# Altium PCB HE280PCB.PcbDoc
Units mil, origin at the board's own origin, x right, y up, seen from the top; angles counter-clockwise.
Board outline 1899.12 x 1801.97 mil, 2 copper layers (Top Layer, Top, Bottom Layer, Bottom), stack 60.8 mil thick; 61 components, 24 nets, 133 pads, 28 vias.
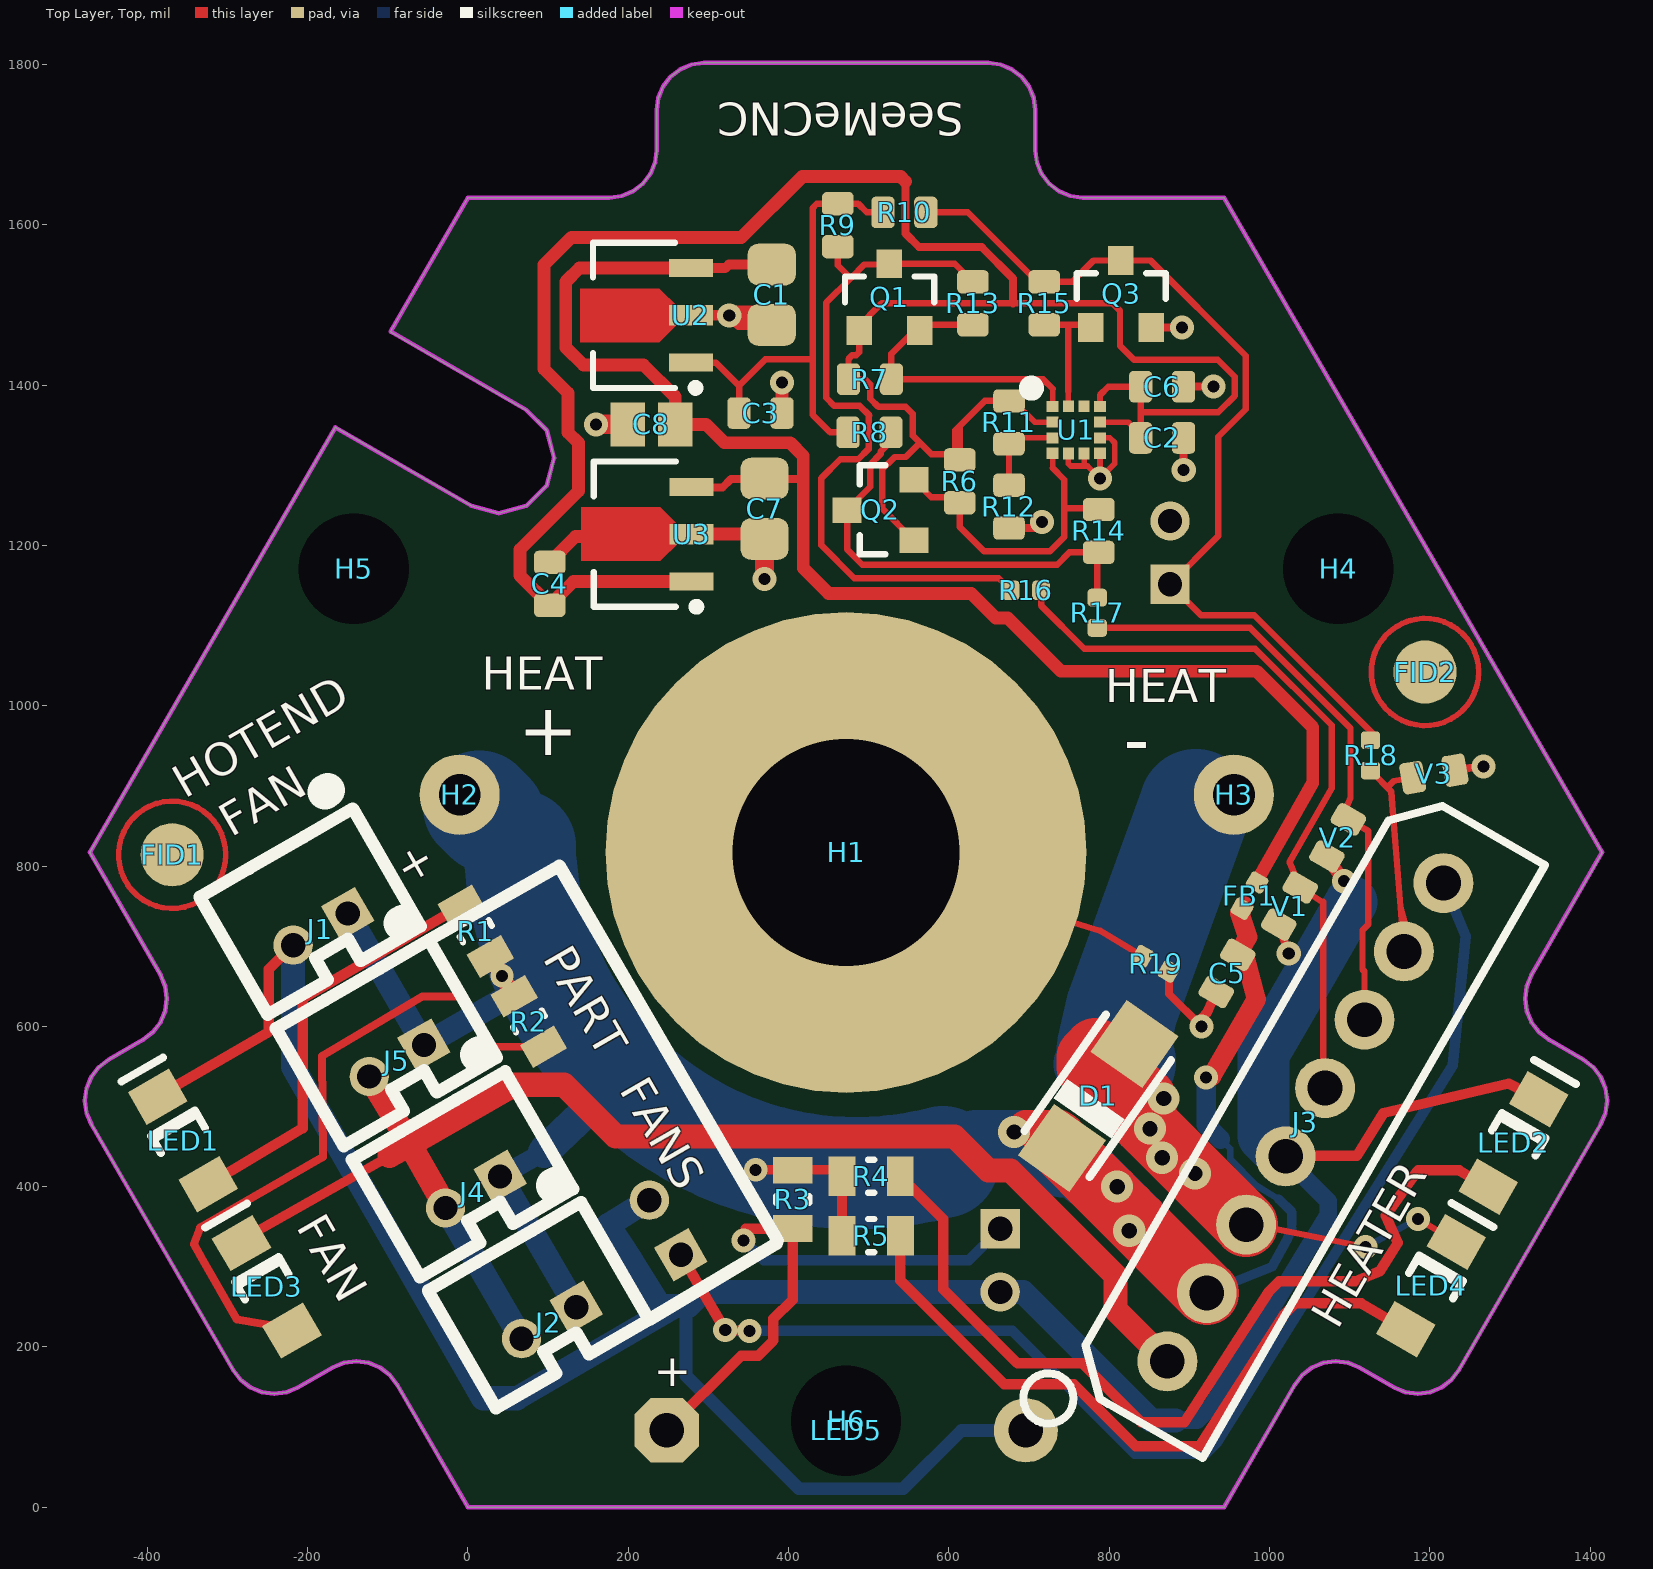
[diagram p0: Top Layer, Top view]
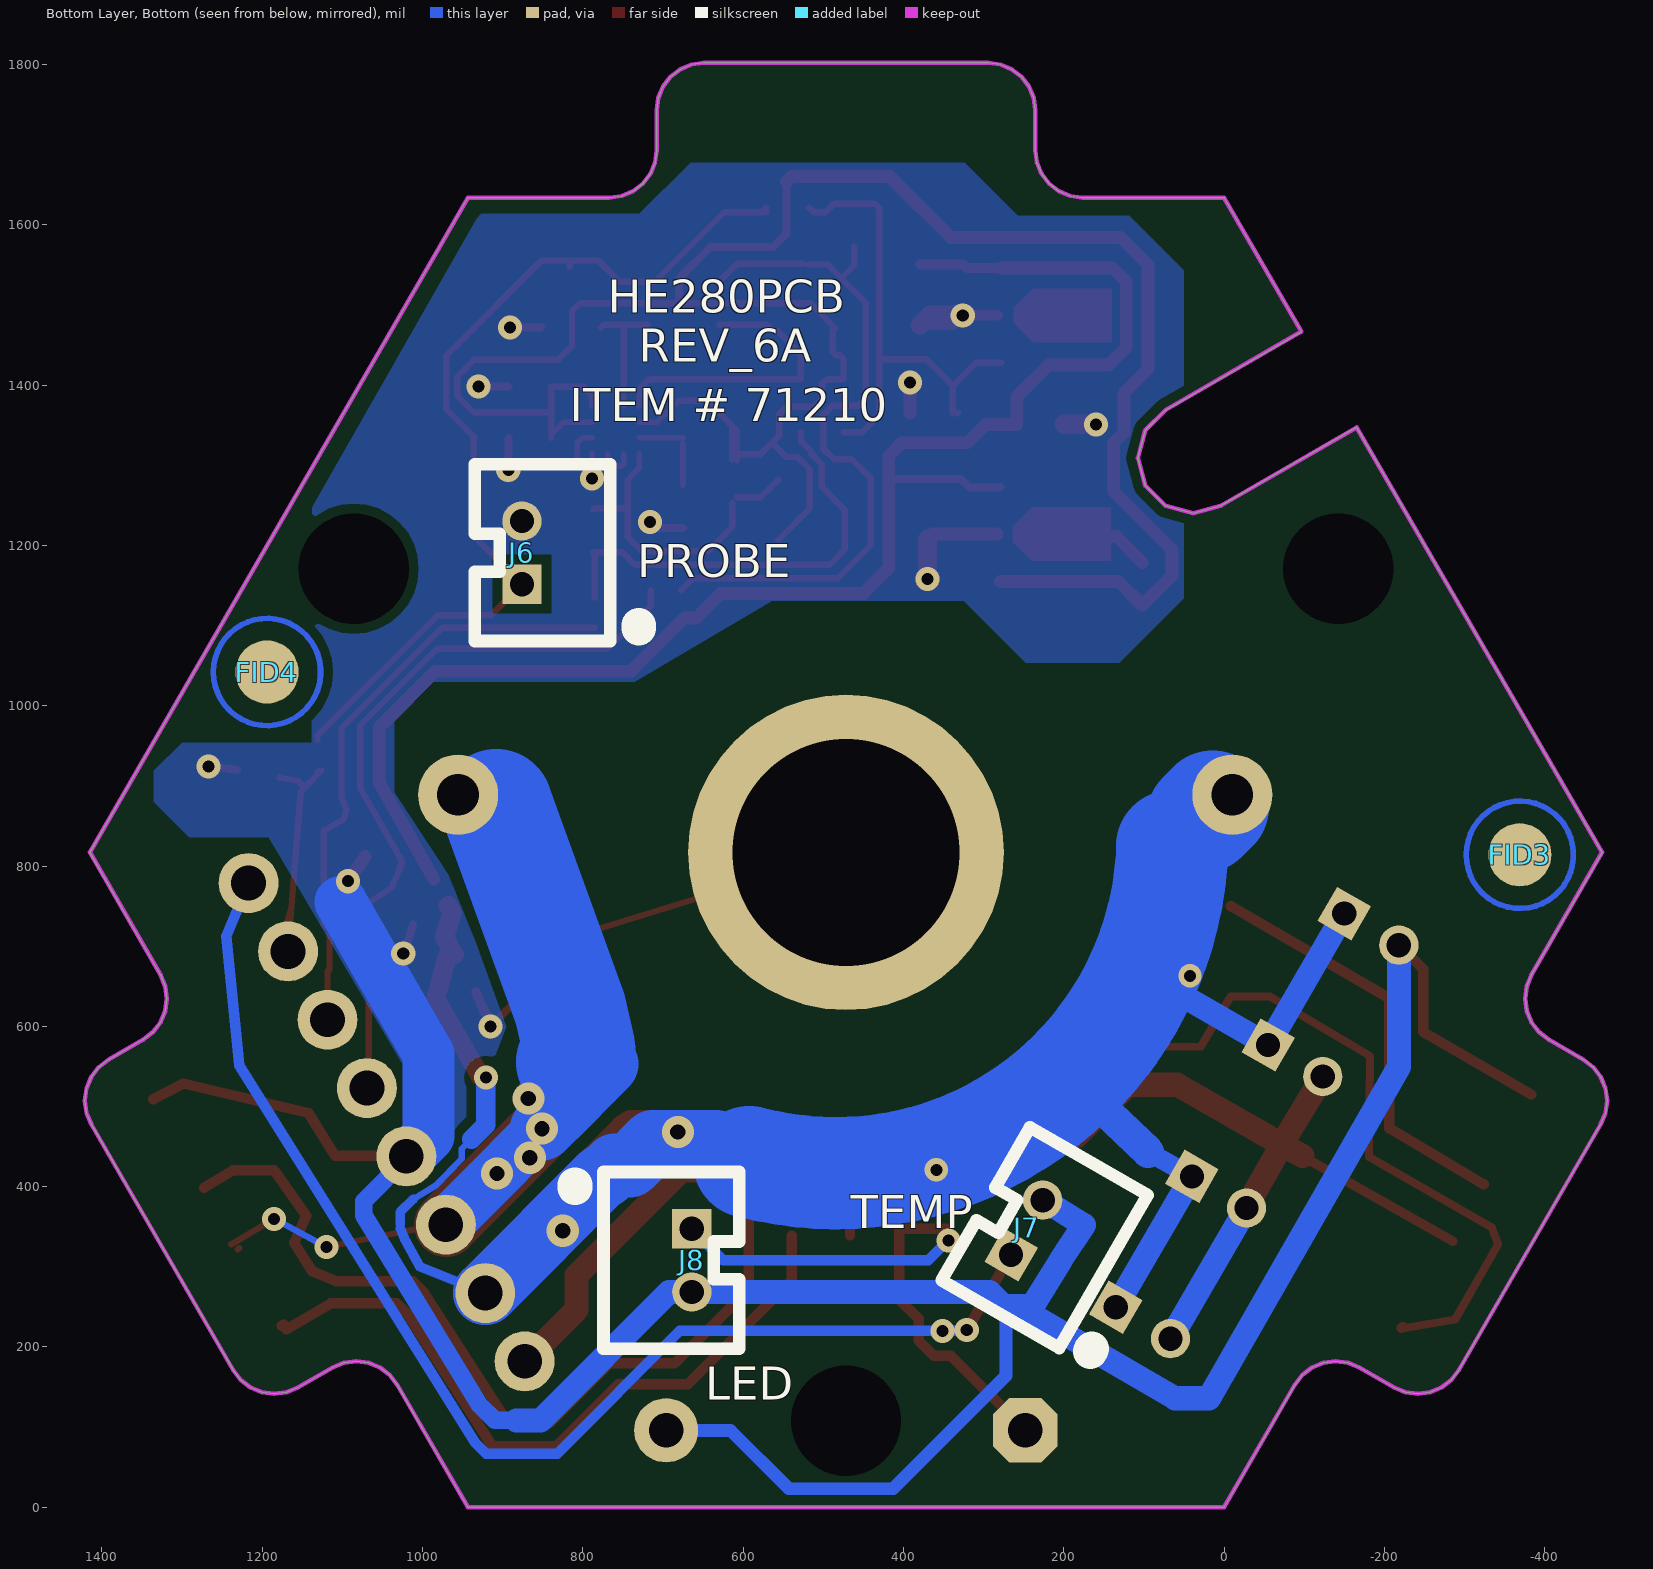
[diagram p1: Bottom Layer, Bottom view, seen from below]

## Layer stack, top to bottom
Top Solder, Top Mask: solder mask 0.4, Solder Resist, Dk 3.5
Top Layer, Top: signal copper 1.4
Dielectric 1: dielectric 58, FR-4, Dk 4.8
Bottom Layer, Bottom: signal copper 1.4
Bottom Solder, Bot Mask: solder mask 0.4, Solder Resist, Dk 3.5

## Board outline
-292.83,170.98 -470,477.83 -475.9,492.08 -477.91,507.36 -475.9,522.65 -470,536.89 -460.61,549.12 -448.39,558.5 -405.08,583.5 -392.85,592.89 -383.47,605.13 -377.57,619.37 -375.56,634.65 -377.57,649.94 -383.46,664.19 -471.65,816.93 -165.45,1347.3 4.13,1249.38 38.58,1240.15 73.03,1249.39 98.25,1274.61 107.48,1309.06 98.25,1343.51 73.03,1368.72 -96.55,1466.63 0,1633.86 176.38,1633.86 191.66,1635.87 205.9,1641.77 218.13,1651.15 227.52,1663.39 233.42,1677.63 235.43,1692.91 235.43,1742.91 237.44,1758.2 243.34,1772.44 252.73,1784.67 264.96,1794.06 279.2,1799.96 294.49,1801.97 648.82,1801.97 664.1,1799.96 678.35,1794.06 690.57,1784.67 699.96,1772.44 705.86,1758.2 707.87,1742.91 707.87,1692.91 709.89,1677.63 715.78,1663.39 725.17,1651.15 737.4,1641.77 751.64,1635.87 766.93,1633.86 943.31,1633.86 1414.96,816.93 1326.77,664.19 1320.87,649.94 1318.87,634.66 1320.88,619.37 1326.78,605.13 1336.16,592.89 1348.39,583.5 1391.69,558.5 1403.92,549.12 1413.3,536.89 1419.2,522.64 1421.21,507.36 1419.2,492.07 1413.31,477.83 1236.14,170.98 1226.76,158.75 1214.53,149.37 1200.28,143.47 1185,141.46 1169.71,143.47 1155.47,149.37 1112.17,174.37 1097.92,180.27 1082.63,182.28 1067.35,180.26 1053.11,174.36 1040.88,164.97 1031.5,152.74 943.31,0 0,0 -88.19,152.74 -97.57,164.97 -109.8,174.36 -124.05,180.26 -139.33,182.28 -154.61,180.26 -168.86,174.37 -212.17,149.37 -226.41,143.47 -241.69,141.46 -256.98,143.47 -271.22,149.37 -283.45,158.75

## Design rules (kind name [scope] priority, off if disabled: settings)
Clearance "Clearance Polygon" [InPolygon] p1: gap=12 ignorepadtopadclearanceinfootprint=FALSE
Clearance [All] p2: gap=5.4 ignorepadtopadclearanceinfootprint=FALSE
HoleSize [All] p1: absolutevalues=TRUE maxlimit=300 minlimit=15 maxpercent=80.000 minpercent=20.000
MinimumAnnularRing [All] p1: minimumring=7
MinimumSolderMaskSliver [All] p1: minsoldermaskwidth=4
PasteMaskExpansion [All] p1: expansion=-1
PlaneConnect [All] p1: planeconnectstyle=Direct reliefexpansion=20 reliefentries=4 reliefconductorwidth=10 reliefairgap=10
PolygonConnect PolygonConnect_Via [IsVia] p1: connectstyle=Direct reliefconductorwidth=10 reliefentries=4 polygonreliefangle="90 Angle" airgapwidth=10
PolygonConnect [All] p2: connectstyle=Direct reliefconductorwidth=10 reliefentries=4 polygonreliefangle="90 Angle" airgapwidth=10
RoutingVias [All] p1: holewidth=15 width=32 viastyle="Through Hole" minholewidth=15 minwidth=30 maxholewidth=30 maxwidth=50
SilkToSolderMaskClearance [IsPad] p1: minsilkscreentomaskgap=9 clearancetoexposedcopper=TRUE
SolderMaskExpansion [All] p1: expansion=4
Width [All] p1: maxlimit=200 minlimit=7 preferedwidth=8 minimp=50.000000 maximp=50.000000 favimp=50.000000
25 further rules are at their usual default settings.

## Components (designator, comment, footprint, x,y, rotation, side; value= is the part's Value field where it differs from the comment)
C1 "1uF" C0805#1 379,1513 r270 top
C2 "100nF" C0603 866,1334 r0 top
C3 "100nF" C0603 365,1365 r0 top
C4 "100nF" C0603 102,1152 r90 top
C5 "100nF" C0603 947,666 r240 top
C6 "100nF" C0603 866,1398 r0 top
C7 "1uF" C0805#1 370,1246 r270 top
C8 "10uF" C0805#2 229,1351 r180 top
D1 "SK310A-TP" SMA-SM 786,513 r55 top
FB1 "120R" R0402 975,763 r60 top value=120Rfb
FID1 "FIDUCIAL" FIDUCIAL-2x3-Panel -369,814 r0 top
FID2 "FIDUCIAL" FIDUCIAL-2x3-Panel 1194,1042 r0 top
FID3 "FIDUCIAL" FIDUCIAL-2x3-Panel -369,814 r180 bottom
FID4 "FIDUCIAL" FIDUCIAL-2x3-Panel 1194,1042 r180 bottom
H1 "SeeMe Hot End" "PAD 0.1-HOTEND" 471.65,816.93 r0 top
H2 "PTH 49mil" "PTH 49mil" -10.35,947.93 r0 top
H3 "PTH 49mil" "PTH 49mil" 955.65,947.93 r0 top
H4 "Hole_3.5mm" Hole_3.5mm 1085.65,1170.93 r0 top
H5 "Hole_3.5mm" Hole_3.5mm -142.35,1170.93 r0 top
H6 "Hole_3.5mm" Hole_3.5mm 471.65,107.93 r0 top
J1 "B2B-PH-K-S(LF)(SN)" B2B-PH-K-S(LF)(SN) -184,721 r210 top
J2 "B2B-PH-K-S(LF)(SN)" B2B-PH-K-S(LF)(SN) 101,230 r210 top
J3 "1778612" 1778612 1044.72,480.36 r60 top
J4 "B2B-PH-K-S(LF)(SN)" B2B-PH-K-S(LF)(SN) 6,393 r210 top
J5 "B2B-PH-K-S(LF)(SN)" B2B-PH-K-S(LF)(SN) -89,557 r210 top
J6 "B2B-PH-K-S(LF)(SN)" B2B-PH-K-S(LF)(SN) 875.98,1190.94 r90 bottom
J7 "B2B-PH-K-S(LF)(SN)" B2B-PH-K-S(LF)(SN) 246,349 r120 bottom
J8 "B2B-PH-K-S(LF)(SN)" B2B-PH-K-S(LF)(SN) 664,308 r270 bottom
LED1 "APT3216VBC/D" LED1206 -355.46,457.46 r300 top
LED2 "APT3216VBC/D" LED1206 1304.54,454.46 r240 top
LED3 "APT3216SURCK" LED1206 -251,275 r300 top
LED4 "APT3216SURCK" LED1206 1201.54,276.46 r240 top
LED5 "LED-Hot End" "HE LED" 472,96 r0 top
Q1 "BSN20BKR" SOT23-3 525.51,1507.43 r0 top
Q2 "BSN20BKR" SOT23-3 517,1244 r90 top
Q3 "BSN20BKR" SOT23-3 814.47,1511.37 r0 top
R1 "4.7K" R0805 9.84,718.5 r300 top
R2 "2.7K" R0805 76,606 r120 top
R3 "470" R0805 405,384 r270 top
R4 "4.7K" R0805 503,413 r0 top
R5 "2.7K" R0805 503.06,338.93 r0 top
R6 "1K" R0603 613.51,1279.86 r90 top
R7 "1K" R0603 501.51,1407.4 r180 top
R8 "1K" R0603 501,1341 r180 top
R9 "1K" R0603 461.51,1599.43 r90 top
R10 "1K" R0603 544.51,1615.43 r180 top
R11 "1K" R0603 675,1353.43 r90 top
R12 "R0603TBD" R0603 675,1248.43 r90 top
R13 "0r" R0603 630,1502 r90 top
R14 "0r" R0603 787,1218 r270 top
R15 "0r" R0603 719,1502 r90 top
R16 "0R" R0402 696,1144 r0 top
R17 "0R" R0402 785,1116 r270 top
R18 "0R" R0402 1126,938 r270 top
R19 "1M" R0402 858,678 r150 top
U1 "IIS2DHTR" LGA12C50P4X4_200X200X100 759,1344 r0 top
U2 "L78L05ABUTR" SOT89-150P347X160-3L 221,1487 r180 top
U3 "L78L33ACUTR" SOT89-150P347X160-3L 222,1214 r180 top
V1 "CG0603MLC-05E" R0603 1025,750 r60 top
V2 "CG0603MLC-05E" R0603 1085,835 r60 top
V3 "CG0603MLC-05E" R0603 1205,915 r190 top

## Footprints (in the part's own frame and the unit in brackets; to place one, negate y for a bottom-side part, rotate by r counter-clockwise, add the part's x,y. Pads: shape width x height; smd on the part's side, far side on the other; paste and mask are expansions set on the pad)
1778612 [mm] "Connector 8 pin 2.5mm Pin in Paste"
  round 1.9 hole 1.1 paste-0.05: 1(-8.75,0) 2(-6.25,0) 3(-3.75,0) 4(-1.25,0) 5(1.25,0) 6(3.75,0) 7(6.25,0) 8(8.75,0)
  silkscreen extent -12.44,-2.5 10.85,3.47, body extent -10.85,-2.5 10.85,2.5, height 7.5
B2B-PH-K-S(LF)(SN) [mil] "B2B-PH-K-S(LF)(SN)"
  rect 49x49 hole 30.32: 1(-39.37,0)
  round 49 hole 30.32: 2(39.37,0)
  silkscreen extent -110,-146 110,59, body extent -110,-110 110,59, height 236
C0603 [mm]
  rrect40% 0.74x1 smd: 1(-0.68,0) 2(0.68,0)
  body extent -0.8,-0.4 0.8,0.4, height 0.8
C0805#1 [mil]
  rrect50% 52x60 smd: 1(-37.4,0) 2(38,0)
  body extent -40,-30 40,30, height 35
C0805#2 [mil] "Chip Capacitor, Body 2.0x1.3mm, IPC High Density"
  rect 43.31x55.12 smd: 1(-29.53,0) 2(29.53,0)
  body extent -43,-29 43,29, height 55
FIDUCIAL-2x3-Panel [mm]
  rrect100% 2x2 smd paste+0 mask+0.508: 1(0,0)
  Top Layer, Top circle w0.178: c0,0 r1.7
  body extent -1.01,-1.01 1.02,1.01, height 0.02
"HE LED" [mil] "SeeMe hot end led"
  oct 80x80 hole 43: A(-224,0)
  round 80 hole 43: C(224,0)
  body extent -264,-40 264,40, height 3
Hole_3.5mm [mm]
  round 0 hole 3.5 mask-0.254: hole(0,0)
  body extent -1.75,-1.75 1.75,1.75, height 0.1
LED1206 [mm]
  rect 1.2x1.5 smd: A(1.6,0) C(-1.6,0)
  silkscreen extent -2.6,-0.8 0,0.8, body extent -1.6,-0.8 1.6,0.8, height 0.75
LGA12C50P4X4_200X200X100 [mm] "LGA, 12-Leads, Body 2.00x2.00mmx1.00mm, Pitch 0.50mm"
  rect 0.375x0.35 smd paste-0.01 mask+0.102: 1(-0.75,0.738) 2(-0.75,0.25) 3(-0.75,-0.25) 4(-0.75,-0.738) 7(0.75,-0.738) 8(0.75,-0.25) 9(0.75,0.25) 10(0.75,0.738)
  rect 0.35x0.375 smd paste-0.01 mask+0.102: 5(-0.25,-0.75) 6(0.25,-0.75) 11(0.25,0.75) 12(-0.25,0.75)
  silkscreen extent -1.62,1.13 -1.23,1.52, body extent -1,-1 1,1, height 1
"PAD 0.1-HOTEND" [mil]
  round 600 / inner round 600 / far side round 393.7 hole 283.5: 1(0,0)
  body extent -300,-300 300,300, height 1
"PTH 49mil" [mm]
  round 2.54 hole 1.32: 1(0,-1.5)
R0402 [mil]
  rrect40% 22x24 smd: 1(-18.9,0) 2(19,0)
  body extent -20,-10 20,10, height 14
R0603 [mm]
  rrect40% 0.74x1 smd: 1(-0.68,0) 2(0.68,0)
  body extent -0.8,-0.4 0.8,0.4, height 0.8
R0805 [mm]
  rect 0.85x1.25 smd: 1(-0.925,0) 2(0.925,0)
  silkscreen extent -0.1,-0.52 0.1,0.53, body extent -1.1,-0.7 1.1,0.7, height 0.5
SMA-SM [mil]
  rect 79x79 smd: A(79,0) C(-78.74,0)
  silkscreen extent -89,-49 89,50, body extent -105,-54 105,55, height 116
SOT23-3 [mil]
  rect 32x36 smd: 1(-37.4,-39.37) 2(38,-39.37) 3(0,44)
  silkscreen extent -55,-4 56,28, body extent -59,-45 59,53, height 44
SOT89-150P347X160-3L [mm] "SOT89, 3-Leads, Body 4.50x2.48mm, Pitch 1.50mm, Lead Span 3.5mm, IPC High Density"
  rect 1.4x0.57 smd: 1(-1.45,1.5) 3(-1.45,-1.5)
  rect 1.4x0.65 smd: 2(-1.45,0)
  Top Layer, Top region: -1.05,0.25 -0.45,0.85 2.05,0.85 2.05,-0.85 -0.45,-0.85 -1.05,-0.25
  silkscreen extent -1.73,-2.3 1.65,2.42, body extent -0.95,-2.3 1.65,2.3, height 1.6

## Part data
C1 C7: library part "1uF 0805 50V X7R", "CAP CER 0805 1uF 50V 10% X7R", Manufacturer=Murata, MANUFACTURER #=GRM21BR71H105KA12L, TOLERANCE=10%, DISTRIBUTOR=Digikey, DISTRIBUTOR #=490-4736-2-ND, EE_SPEC=50V, PART="1uF 50V X7R 0805", PART DESCRIPTION="1µF ±10% 50V Ceramic Capacitor X7R 0805 (2012 Metric)"
C2 C3 C4 C5 C6: library part C0603C104K5RACTU, "CAP CER 0603 100nF 50V 10% X7R", LastRevisionDate=23-Apr-2014, LastRevisionNote=ImportComponents, ManufacturerPartNumber=C0603C104K5RACTU, Published=23-Apr-2014, Publisher=UltiMachine
C8: library part GRM21BR61C106KE15K, "CAP CER 10UF 16V X5R 0805", LastRevisionDate=23-Apr-2014, LastRevisionNote=ImportComponents, ManufacturerPartNumber=GRM21BR61C106KE15K, Published=23-Apr-2014, Publisher=UltiMachine
D1: library part SK310A, "DIODE Schottky 3A SMA", LastRevisionDate=23-Apr-2014, LastRevisionNote=ImportComponents, ManufacturerPartNumber=SK310A, Published=23-Apr-2014, Publisher=UltiMachine
FB1: library part "FERRITE 120R 1A 0402", "FERRITE BEAD 120 OHM 0402 1LN", Manufacturer="Taiyo Yuden", MANUFACTURER #=BKP1005HS121-T, TOLERANCE=-NA-, DISTRIBUTOR=Digikey, DISTRIBUTOR #=587-1921-2-ND, EE_SPEC=1A, PART="FERRITE 120R 1A 0402", PART DESCRIPTION="FERRITE BEAD 120 OHM 0402 1LN"
FID1 FID2 FID3 FID4: "Fiducial", LastRevisionDate=23-Apr-2014, LastRevisionNote=ImportComponents, Published=23-Apr-2014, Publisher=UltiMachine
J1 J2 J4 J5 J6 J7 J8: "Conn JST 2 position"
J3: "Conn 2.5mm Pin in Paste Phoenix"
LED1 LED2: "LED BLUE CLEAR 1206 SMD", LastRevisionDate=23-Apr-2014, LastRevisionNote=ImportComponents, Published=23-Apr-2014, Publisher=UltiMachine
LED3 LED4: "LED RED CLEAR 1206 SMD", LastRevisionDate=23-Apr-2014, LastRevisionNote=ImportComponents, Published=23-Apr-2014, Publisher=UltiMachine
Q1 Q2 Q3: "MOSFET N-CH 60V 0.265A SOT-23", LastRevisionDate=23-Apr-2014, LastRevisionNote=ImportComponents, ManufacturerPartNumber=BSN20BKR, Published=23-Apr-2014, Publisher=UltiMachine
R1 R4: library part RC0805FR-074K7L, "RES SMD 4.7K OHM 5% 1/8W 0805", LastRevisionDate=23-Apr-2014, LastRevisionNote=ImportComponents, Published=23-Apr-2014, Publisher=UltiMachine
R2 R5: library part RC0805FR-072K7L, "RES SMD 2.7K OHM 5% 1/8W 0805", LastRevisionDate=23-Apr-2014, LastRevisionNote=ImportComponents, Published=23-Apr-2014, Publisher=UltiMachine
R3: library part RC0805JR-07470RL, "RES SMD 470 OHM 5% 1/8W 0805", LastRevisionDate=23-Apr-2014, LastRevisionNote=ImportComponents, Published=23-Apr-2014, Publisher=UltiMachine
R6 R7 R8 R9 R10 R11: library part ERJ-3EKF1001V, "RES 0603 1K 100mW 1%", LastRevisionDate=23-Apr-2014, LastRevisionNote=ImportComponents, ManufacturerPartNumber=ERJ-3EKF1001V, Published=23-Apr-2014, Publisher=UltiMachine
R12: "Resistor", LastRevisionDate=23-Apr-2014, LastRevisionNote=ImportComponents, Published=23-Apr-2014, Publisher=UltiMachine
R13 R14 R15: library part CR0603J000ELF, "RES 0603 0r 100mW 1%", LastRevisionDate=23-Apr-2014, LastRevisionNote=ImportComponents, ManufacturerPartNumber=CR0603J000ELF, Published=23-Apr-2014, Publisher=UltiMachine
R16 R17 R18: library part "0R 0402", "RES SMD 0.0OHM JUMPER 1/10W 0402", Manufacturer=Panasonic, MANUFACTURER2#=RC0402JR-070RL, MANUFACTURER #=ERJ-2GE0R00X, TOLERANCE=1%, DISTRIBUTOR=Digikey, DISTRIBUTOR #=P0.0JTR-ND, PART=0R, PART DESCRIPTION="0.0 Ohm Jumper 0.1W, 1/10W Chip Resistor 0402 (1005 Metric) Automotive AEC-Q200 Thick Film"
R19: library part "1M 5% 0402", "RES 0402 1M 100mW 5%", Manufacturer=Panasonic, MANUFACTURER #=ERJ2GEJ105X, TOLERANCE=5%, DISTRIBUTOR=Digikey, DISTRIBUTOR #=P1.0MJTR-ND, EE_SPEC=1/10W, PART="1M 5% 0402", PART DESCRIPTION="1M Ohm ±5% 0.1W, 1/10W Chip Resistor 0402 (1005 Metric) Automotive AEC-Q200 Thick Film"
U1: "3-axis accelerometer with digital output"
U2: "IC REG LDO 5V 0.1A SOT89-3"
U3: "IC REG LDO 3.3V 0.1A SOT89-3"
V1 V2 V3: library part R-US_R0603, "RESISTOR, American symbol"

## Via types
v1: diameter 30, hole 15, Top Layer, Top to Bottom Layer, Bottom, tented both sides, 19 vias
v2: diameter 40, hole 19.12, Top Layer, Top to Bottom Layer, Bottom, tented both sides, 7 vias
v3: diameter 29, hole 15, Top Layer, Top to Bottom Layer, Bottom, tented both sides, 2 vias

## Nets (pads, with @x,y where several pads share a name; then routed paths per layer and width w, separated by ;. In a path a pad name is that pad's centre, name@x,y a point inside that pad or via, vN(x,y) a via of type N, cw(c..) or ccw(c..) an arc to the next point about the centre after c; other vN are vias at no path point)
3V3: C2.1 C4.1 C6.1 Q1.1 Q2.1 R6.2 R7.2 R11.2 U1.2 U1.9 U1.10 U3.1 | length 2994.3
  Top Layer, Top w7: R11.2 680.74,1380.2 707.1,1353.84 U1.2 ; U1.9 823.84,1353.84 839.23,1338.46 C2.1 ; U1.10@788.53,1373.53 788.53,1387.53
  Top Layer, Top w8: Q1.1@485.11,1471.06 516.05,1502 543.05,1502 ; Q1.1 488.11,1441.03 484.51,1437.43 479.62,1437.43 474.74,1432.54 R7.2 495.6,1407.4 502,1401 502,1383 512.3,1372.7 546.3,1372.7 555,1364 555,1337 564,1328 ; 529.79,1307.74 517,1294.95 517,1245.97 Q2.1 ; 529.79,1307.79 532.31,1310.31 546.31,1310.31 564,1328 ; 560,1502 543.05,1502 ; R6.2@608,1306.2 R6.2@608,1313.77 ; R6.2 613.51,1348.94 ; R11.2 644.77,1380.2 613.51,1348.94 ; 788.53,1387.53 799,1398 C6.1 839.23,1366 ; C2.1@839.23,1338.46 839.23,1366 ; 543.05,1502 680,1502 804,1502 813.47,1492.53 813.47,1448.96 831,1431.43 935.51,1431.43 956.51,1410.43 956.51,1386.43 936.08,1366 839.23,1366 ; 564,1328 578.23,1313.77 R6.2@608,1313.77 ; R6.2@608,1313.77 608,1343.43 613.51,1348.94
  Top Layer, Top w10: 546,1654 546,1589 563,1572 641,1572 680,1533 680,1502
  Top Layer, Top w16: U3.1 131.72,1154.94 C4.1 65,1162.23 65,1195 138,1268 138,1328 125,1341 125,1390 95,1420 95,1550 129,1584 341,1584 417,1660 540,1660 546,1654
5V: C3.1 R8.2 R9.2 R10.2 U2.1 | length 621.6
  Top Layer, Top w8: U2.1 309.51,1427.94 338.23,1399.23 ; C3.1@331.71,1365.52 C3.1@332.23,1365 ; C3.1 338.23,1399.23 ; R8.2 451.77,1341 430,1362.77 430,1430 ; R10.2@517.74,1621.43 514.74,1618.43 511.74,1615.43 497.51,1615.43 486.51,1626.43 461.73,1626.43 R9.2 435.29,1626.2 430,1620.92 430,1430 ; 338.23,1399.23 371,1432 428,1432 430,1430
12V: C5.1 D1.C FB1.1 H2.1 J1.1 J2.1 J3.2 J4.1 J5.1 R1.2 R2.2 R3.1 R4.1 R5.1 | length 3059.8
  Top Layer, Top w12: v3(359,421) 458.58,421 R4.1 466.64,412.94 R5.1
  Top Layer, Top w20: R1.2 v3(42.47,663) R2.2
  Top Layer, Top w24: v1(921,535.92) 928.08,537.81 983.65,634.07 C5.1@969.86,685.53 ; C5.1 972.9,711.29 962.96,741.12 965.79,746.51 FB1.1@967.89,750.51
  Top Layer, Top w40: v2@695.66,475.43 D1.C@739.51,475.43
  Top Layer, Top w80: D1.C@733.63,455.31 799.47,389.47 819.57,369.37 834.47,354.47 J3.2
  Bottom Layer, Bottom w8: 939,459 950.93,447.07 950.93,434.68 951.61,434 983.51,401.43 1011.51,384.43
  Bottom Layer, Bottom w12: J3.2 1003.51,300.43 1020.99,332 1025.65,343.02 1027.68,347.8 ; 1011.51,384.43 1027.79,368.15 1027.79,352.91
  Bottom Layer, Bottom w24: J4.1 94.72,443.34 ; v1(921,535.92) 921,477 939,459
  Bottom Layer, Bottom w30: J1.1 J5.1 55.58,640.19 100.59,666.06 ; J4.1 J2.1
  Bottom Layer, Bottom w40: 94.72,443.34 191.49,535.68
  Bottom Layer, Bottom w80: 633.78,455.38 712.62,455.38 741.66,426.35 760.04,426.35 772.47,413.91 775.03,413.91 J3.2
  Bottom Layer, Bottom w140: H2.1@14,874 H2.1@27,861 ; 64.51,824.93 ccw(c484.35,836.74) 82.12,715.86 ccw(c484.35,836.74) 88.19,697.25 ccw(c484.35,836.74) 100.59,666.06 ccw(c484.35,836.74) 191.49,535.68 ccw(c484.35,836.74) 592.46,430.89
  other v2: 825,345 810,400 681.43,468.22
12VCC: C1.1 C7.1 C8.1 FB1.2 U2.3 U3.3 | length 1929.6
  Top Layer, Top w10: U3.3 280.14,1272 317.36,1272 328,1282.64 418.36,1282.64
  Top Layer, Top w12: U2.3 321.06,1546.06 325.4,1550.4 C1.1
  Top Layer, Top w16: U2.3 139.06,1546.06 122,1529 122,1447 144,1425 219,1425 258.53,1385.47 C8.1 297,1351 320,1328 402,1328 418.36,1311.64 418.36,1282.64 418.36,1171.64 450,1140 628,1140 658.5,1109.5 673.5,1109.5 740,1043 984,1043 1054,973 1054,903.73 FB1.2@985.99,783.88
FAN: J2.2 J3.1 J4.2 J5.2 LED3.C | length 1755.1
  Top Layer, Top w12: LED3.C@-284.96,332.02 -284.15,332.47 -97.69,438.1
  Top Layer, Top w30: J5.2 -72,452.75 ; -97.69,438.1 -72,452.75 ; J4.2@-27.42,373.69 -72,452.75 ; J3.1 808,246.49 808,289 677,420 649.61,420 607.01,462.6 184.4,462.6 119.9,527.1 58.31,527.1 -72,452.75
  Bottom Layer, Bottom w30: J4.2 J2.2
GND: C1.2 C2.2 C3.2 C4.2 C5.2 C6.2 C7.2 C8.2 J1.2 J3.4 J6.2 J7.2 J8.2 LED1.C LED2.C LED5.C Q3.2 R12.1 R19.1 U1.5 U1.6 U1.7 U1.8 U2.2 U3.2 V1.1 V2.1 V3.1 | length 4884.5
  Top Layer, Top w7: U1.5 749.16,1301.84 752,1299 768,1299 ; U1.6 768.84,1299.84 768,1299 ; U1.7 v1(788.53,1283.47) ; U1.8 800.84,1334.16 807,1328 807,1301.95 v1(788.53,1283.47) ; 768,1299 773,1299 v1(788.53,1283.47)
  Top Layer, Top w10: R12.1 715.77,1221.66 v1@716,1221.43 ; Q3.2@851.84,1472.63 Q3.2 v1(890.84,1472) ; R19.1 874.37,640.63 v1(915,600) ; C2.2 892.77,1294.23 v1(893,1294) ; C6.2 v1(930,1398) ; V1.1 1023,693 v1(1024,691) ; V3.1 1266.85,924.98 1267,925 v1(1267,924)
  Top Layer, Top w12: v1(915,600) 915,610 922,617 C5.2
  Top Layer, Top w12.99: LED1.C@-383.35,514.93 -248.35,592.93 -248.35,671.06 J1.2 ; U2.2@282.02,1487 v1(326,1487) 338,1475 C1.2 ; J3.4@1017.02,438.58 1020.11,438.58 1108.87,438.58 1109.03,438.43 1142.08,491.75 1298.54,528.46 LED2.C
  Top Layer, Top w16: C4.2 134.23,1211 196,1211 ; U3.2@283.02,1214 364,1214 C7.2 ; C3.2 391.77,1402.77 v1(392,1403) ; V2.1 v1(1093,781)
  Top Layer, Top w24: v1(160,1351) C8.2 ; v1(326,1487) 367,1487 C1.2 ; v1(370,1158) C7.2
  Bottom Layer, Bottom w12.99: 882.51,108.43 892.51,108.43
  Bottom Layer, Bottom w16: 275,251 272,248 272,164 413,23 542.72,23 615.65,95.93 LED5.C@695.65,95.93
  Bottom Layer, Bottom w22: 892.51,108.43 909.48,108.43 929.74,128.68 1073.35,364.14 1073.35,381.59 1072.51,382.43 1018.97,436.61 J3.4@1017.02,438.58
  Bottom Layer, Bottom w30: J1.2 -218.49,549.57 19,136 61,136 259,251 ; J7.2@225.77,383.96 175,352 204,308 239,251 259,251 ; 882.51,108.43 852.51,108.43 692.31,268.63 J8.2 292.63,268.63 275,251 259,251
  Bottom Layer, Bottom w65: J3.4@1017.13,438.69 992.43,463.39 992.43,565.38 1054.75,673.23 1102,755
  other v1: 716,1229
HE: D1.A H3.1 J3.3 LED4.C | length 1453.7
  Top Layer, Top w8: J3.3@970.81,354.62 970.9,354.62 J3.3@997.7,354.62 ; J3.3@992.38,349.3 971.39,354.48 v1(1120,324.81) ; v1(1185,359.81) 1233.14,331.2 LED4.C@1238.42,328.06 ; LED4.C@1228.42,323.26 LED4.C@1230.65,321.93
  Top Layer, Top w80: 774.28,561.28 774.28,549.11 788.74,534.66 790.44,532.96 791,532.4 791.83,531.56 820.95,502.45 840.7,482.7 v2@843.74,479.66 ; 774.32,561.24 D1.A@783.01,569.93 ; D1.A@782.81,570.13 D1.A@783.01,569.93 ; J3.3 v2(907,416.39) v2(851,472.39) v2@843.74,479.66 ; D1.A@783.01,569.93 791.36,561.58 800.51,552.43 805.27,547.67 805.77,547.17 843.74,509.2 843.74,506.76 v2@843.74,479.66
  Bottom Layer, Bottom w8: v1(1120,324.81) v1(1185,359.81)
  Bottom Layer, Bottom w65: 830.51,493.43 840.9,483 851.23,472.63 876.9,446.86 907.12,416.52 J3.3@970.83,352.56
  Bottom Layer, Bottom w80: 830.51,493.43 821.08,502.33 820.95,502.45 ; v2(851,472.39) 820.95,502.45 ; 791.83,531.56 820.95,502.45 ; 791.83,531.56 790.44,532.96 770.4,552.99 791.83,531.56
  Bottom Layer, Bottom w140: 813.02,555.14 813.09,555.44 804.03,569.84 815.71,621.14 H3.1@907.86,875.67
  other v2: 866,436 868,510
INT: J6.1 Q3.3 R10.1 R15.2 R18.1 | length 1175.1
  Top Layer, Top w8: R10.1 R10.1@577.28,1615.43 ; R10.1@571.28,1621.43 R10.1@577.28,1615.43 ; Q3.3@816.57,1547.55 Q3.3 ; R18.1@1131,956.9 1131,963 981,1113 914.56,1113 J6.1 936.08,1211.67 936.08,1335.71 970.37,1370 970.37,1436.63 851.63,1555.37 Q3.3 ; R10.1@577.28,1615.43 623.57,1615.43 710.23,1528.78 R15.2 753.77,1528.77 780.37,1555.37 Q3.3
NetH1_1: H1.1 R19.2 | length 393.4
  Top Layer, Top w8: H1.1 789,719 R19.2
NetJ3_5: J3.5 R16.2 V1.2 | length 930.4
  Top Layer, Top w8: R16.2 715,1125 769,1071 982,1071 1077.6,975.4 1077.6,896.76 1025,805 V1.2 1067,754.3 ; 1067,755.62 1067,754.3 ; J3.5 1067,525.3 1067,754.3
NetJ3_6: J3.6 R17.2 V2.2 | length 751.2
  Top Layer, Top w8: R17.2 976,1097 1101,972 1101,885 1095,870 V2.2 1123,843.71 1123,727 1116,720 1116,671 1118.54,668.46 J3.6
NetJ3_7: J3.7 R18.2 V3.2 | length 337.1
  Top Layer, Top w8: R18.2 R18.2@1131.18,913.82 ; R18.2@1129,919 1131.18,916.82 R18.2@1131.18,913.82 ; V3.2 1155,906 1147,898 ; R18.2@1131.18,913.82 1147,898 ; 1147,898 1152,893 1163.38,748.8 ; 1163.38,748.8 J3.7 1174.89,705.83 1163.38,748.8
NetLED1_A: LED1.A R1.1 | length 527.9
  Top Layer, Top w12.99: LED1.A -206,473 -206,635 R1.1
NetLED2_A: LED2.A R4.2 | length 1114.7
  Top Layer, Top w12.99: R4.2 592.94,359.48 592.94,272.06 685.57,179.43 766.5,179.43 840,105.93 893.65,105.93 999.18,268.94 1012.35,282.11 1107.51,282.11 1138,294.81 1160,329.81 1145,363.81 1183.81,418.43 1185.64,420.26 1236.51,420.26 1272.26,398.63 LED2.A@1272.54,398.46
NetLED3_A: LED3.A R2.1 | length 833.9
  Top Layer, Top w10: LED3.A@-221.97,222.91 -288,234 -331,309 -342,328 -334,349 -181,436.97 -182,563 -56.97,637 -8.2,637 29,575 R2.1
  Top Layer, Top w12.99: LED3.A@-223.08,224.86 LED3.A@-221.4,223.9
NetLED4_A: LED4.A R5.2 | length 879.5
  Top Layer, Top w12.99: R5.2 539.47,282.96 669,153.43 755.57,153.43 833.07,75.93 912.66,75.93 1018.6,241 1031.93,254.33 1114.51,254.33 LED4.A ; LED4.A@1173.11,227.74 LED4.A@1175.54,226.46
NetQ1_2: Q1.2 R7.1 R13.1 U1.1 | length 368.9
  Top Layer, Top w7: U1.1@729.47,1373.53 729.47,1395.43
  Top Layer, Top w8: Q1.2@556.51,1467.06 528.28,1438.83 R7.1 717.5,1407.4 729.47,1395.43 ; Q1.2 570.68,1475.23 R13.1
NetQ2_2: Q2.2 R6.1 R14.1 U1.4 | length 395.1
  Top Layer, Top w7: 729.47,1296.53 U1.4@729.47,1314.47
  Top Layer, Top w8: Q2.2 578.14,1260.23 R6.1@608,1260.23 ; R6.1 613.51,1222.92 644,1192.43 726,1192.43 744,1210.43 744,1246.21 ; 729.47,1296.53 744,1282 744,1246.21 ; R14.1 785.56,1246.21 744,1246.21
NetQ3_1: Q3.1 R15.1 U1.12 | length 161.2
  Top Layer, Top w7: U1.12 749.16,1392.16
  Top Layer, Top w8: R15.1 749,1475.23 ; 749.16,1392.16 749.16,1434.78 749,1434.94 749,1475.23 ; Q3.1 773.84,1475.23 749,1475.23
NetR11_1: R11.1 R12.2 U1.3 | length 106
  Top Layer, Top w7: R11.1@675.07,1334.16 U1.3
  Top Layer, Top w8: R12.2 R11.1 R11.1@675.07,1326.59
PART-LED: J8.1 LED5.A R3.2 | length 734.5
  Top Layer, Top w12.99: LED5.A@247.65,95.93 340.72,189 362,189 381,208 381,235 405,259 R3.2 v1@346.42,347.58
  Bottom Layer, Bottom w12.99: v1(344,333) 369,308 624.63,308 J8.1
SCL: Q1.3 R9.1 R13.2 R16.1 | length 892.4
  Top Layer, Top w8: R9.1 461.51,1549.43 477.51,1533.43 ; Q1.3@518.51,1550.43 494.51,1550.43 477.51,1533.43 ; Q1.3 607.34,1551.43 R13.2 ; R16.1 662.1,1159 482,1159 441,1200 441,1284 464.38,1307.38 487,1307.38 499.79,1320.17 499.79,1360.79 501,1362 489,1374 457,1374 447,1384 447,1502.92 477.51,1533.43
SDA: Q2.3 R8.1 R14.2 R17.1 | length 554
  Top Layer, Top w8: R8.1 527.77,1329.77 514.79,1316.79 514.79,1313.96 502,1301.16 502,1273 Q2.3 473,1195 492,1176 735,1176 750.23,1191.23 R14.2 785,1189.22 R17.1
THERM: J3.8 J7.1 | length 1633.4
  Top Layer, Top w12.99: J7.1 v1(321,221) v1(351,220)
  Bottom Layer, Bottom w12.99: v1(321,221) 322,220 v1(351,220) 679.01,220 832,67.01 861.51,67.01 890.52,66.92 ; 913.57,66.85 890.52,66.92 ; J3.8@1217.47,778.02 1245.05,712.31 1228.78,551.87 ; 1228.75,551.51 1228.78,551.87 ; 890.52,66.92 920.72,66.92 933.79,80 1228.78,551.87
pads on no net: FID1.1 FID2.1 FID3.1 FID4.1 H4.hole H5.hole H6.hole U1.11

## Polygon pours and split planes (outlines as drawn)
GND on Bottom Layer, Bottom "Std" (solid, remove dead copper, pour order 4): 1191.86,835.85 1290.85,835.85 1335,880 1335,919 1300,954 1075.99,954 968,789 893,605.13 959,441
GND on Bottom Layer, Bottom "Std" (solid, remove dead copper, pour order 2): 1035.51,863 1035.51,980.28 985.79,1030 735.46,1030 563.51,1131 325,1131 247.43,1053.43 130.81,1053.43 50,1134.24 50,1543 118.43,1611.43 257.43,1611.43 323.63,1677.63 665.31,1677.63 729.51,1613.43 926.51,1613.43 932.51,1607.43 1137.67,1247.33 1138.09,863

## Keep-outs
Keep-Out Layer, Board:
  the board outline again, w5.51

## Silkscreen, mask and mechanical layers (free items; w line width, h text height)
Top Overlay, Top Silk:
  lines w16: -48.65,707.59 114,800 386,333 ; 225.99,233.97 385,329
  text "SeeMeCNC" at 618.51,1752.43 h41.01 r180
  text "HEAT" at 17,1020 h41.01
  text "HEAT" at 795,1004 h41.01
  text "+" at 63,938 h65.62
  text "-" at 818,926 h65.62
  text "HOTEND" at -353,883 h41.01 r30
  text "FAN" at -295,835 h41.01 r30
  text "+" at -92,814 h41.01 r300
  text "PART" at 93,685 h41.01 r300
  text "FANS" at 188,521 h41.01 r300
  text "FAN" at -215,350 h41.01 r300
  text "HEATER" at 1085,220 h41.01 r60
Bottom Overlay, Bot Silk:
  text "HE280PCB" at 768.85,1490 h41.01
  text "REV_6A" at 730,1429.33 h41.01
  text "ITEM # 71210" at 816.11,1355 h41.01
  text "PROBE" at 732,1160 h41.01
  text "TEMP" at 466,348 h41.01
  text "LED" at 647,134 h41.01
Route:
  lines w5.51: 0,0 -88.19,152.74 -97.57,164.97 -109.8,174.36 -124.05,180.26 -139.33,182.28 -154.61,180.26 -168.86,174.37 -212.17,149.37 -226.41,143.47 -241.69,141.46 -256.98,143.47 -271.22,149.37 -283.45,158.75 -292.83,170.98 -470,477.83 -475.9,492.08 -477.91,507.36 -475.9,522.65 -470,536.89 -460.61,549.12 -448.39,558.5 -405.08,583.5 -392.85,592.89 -383.47,605.13 -377.57,619.37 -375.56,634.65 -377.57,649.94 -383.46,664.19 -471.65,816.93 -165.45,1347.3 4.13,1249.38 38.58,1240.15 73.03,1249.39 98.25,1274.61 107.48,1309.06 98.25,1343.51 73.03,1368.72 -96.55,1466.63 0,1633.86 176.38,1633.86 191.66,1635.87 205.9,1641.77 218.13,1651.15 227.52,1663.39 233.42,1677.63 235.43,1692.91 235.43,1742.91 237.44,1758.2 243.34,1772.44 252.73,1784.67 264.96,1794.06 279.2,1799.96 294.49,1801.97 ; 648.82,1801.97 664.1,1799.96 678.35,1794.06 690.57,1784.67 699.96,1772.44 705.86,1758.2 707.87,1742.91 707.87,1692.91 709.89,1677.63 715.78,1663.39 725.17,1651.15 737.4,1641.77 751.64,1635.87 766.93,1633.86 943.31,1633.86 1414.96,816.93 1326.77,664.19 1320.87,649.94 1318.87,634.66 1320.88,619.37 1326.78,605.13 1336.16,592.89 1348.39,583.5 1391.69,558.5 1403.92,549.12 1413.3,536.89 1419.2,522.64 1421.21,507.36 1419.2,492.07 1413.31,477.83 1236.14,170.98 1226.76,158.75 1214.53,149.37 1200.28,143.47 1185,141.46 1169.71,143.47 1155.47,149.37 1112.17,174.37 1097.92,180.27 1082.63,182.28 1067.35,180.26 1053.11,174.36 1040.88,164.97 1031.5,152.74 943.31,0

## Text inside footprints (layer, text, board x,y; h text height)
LED5: Top Overlay, Top Silk "+" at 231.84,151.12 h41.01